# Altium PCB Receiver.PcbDoc (part 3 of 4)
Units mil, origin at the board's own origin, x right, y up, seen from the top; angles counter-clockwise.
Board outline 6370 x 5700 mil, 4 copper layers (Top Layer, GND, VCC, Bottom Layer), stack 23.756 mil thick; 303 components, 262 nets, 1184 pads, 312 vias.
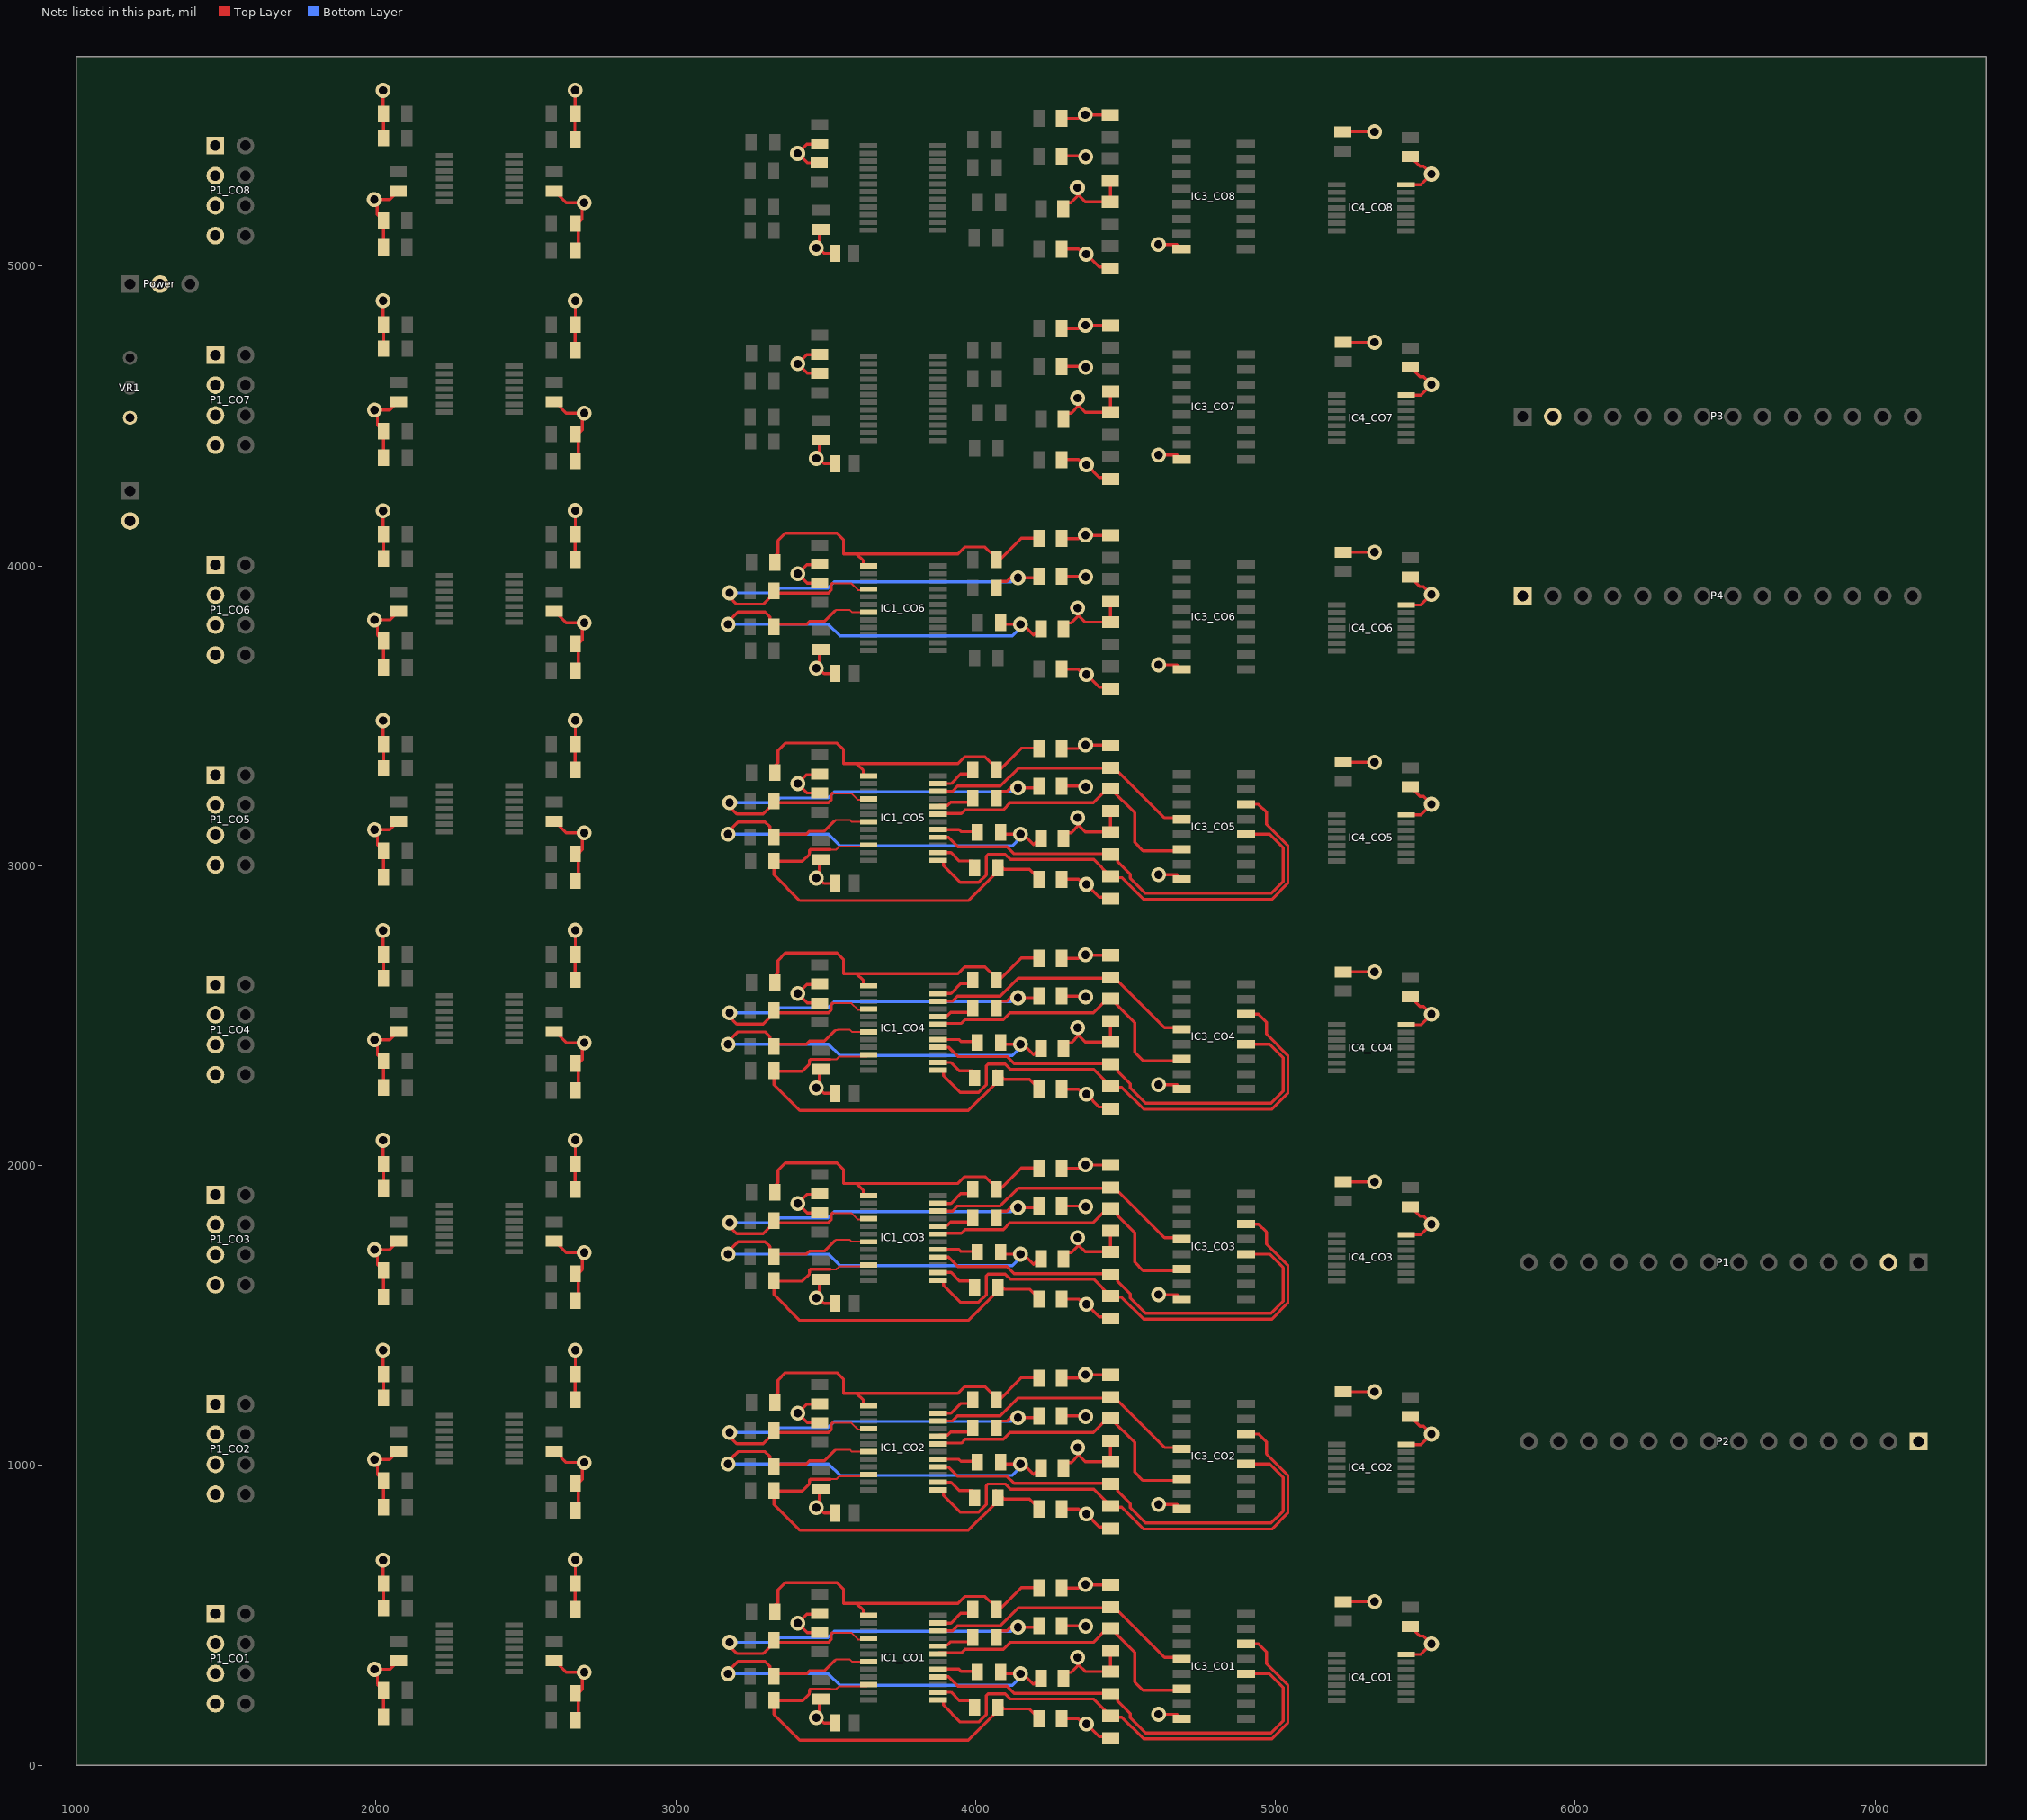
[diagram p5: the nets of this part, all layers, seen from the top]

## Via types
v1: diameter 50, hole 28, Top Layer to Bottom Layer, 312 vias

## Nets (pads, with @x,y where several pads share a name; then routed paths per layer and width w, separated by ;. In a path a pad name is that pad's centre, name@x,y a point inside that pad or via, vN(x,y) a via of type N, cw(c..) or ccw(c..) an arc to the next point about the centre after c; other vN are vias at no path point) (continued)
GND: C1_CO1.1 C1_CO2.1 C1_CO3.1 C1_CO4.1 C1_CO5.1 C1_CO6.1 C1_CO7.1 C1_CO8.1 C2_CO1.1 C2_CO2.1 C2_CO3.1 C2_CO4.1 C2_CO5.1 C2_CO6.1 C2_CO7.1 C2_CO8.1 C3_CO1.1 C3_CO2.1 C3_CO3.1 C3_CO4.1 C3_CO5.1 C3_CO6.1 C3_CO7.1 C3_CO8.1 C4_CO1.1 C4_CO2.1 C4_CO3.1 C4_CO4.1 C4_CO5.1 C4_CO6.1 C4_CO7.1 C4_CO8.1 C5_CO1.2 C5_CO2.2 C5_CO3.2 C5_CO4.2 C5_CO5.2 C5_CO6.2 C5_CO7.2 C5_CO8.2 C6_CO1.2 C6_CO2.2 C6_CO3.2 C6_CO4.2 C6_CO5.2 C6_CO6.2 C6_CO7.2 C6_CO8.2 C7_CO1.2 C7_CO2.2 C7_CO3.2 C7_CO4.2 C7_CO5.2 C7_CO6.2 C7_CO7.2 C7_CO8.2 C8_CO1.2 C8_CO2.2 C8_CO3.2 C8_CO4.2 C8_CO5.2 C8_CO6.2 C8_CO7.2 C8_CO8.2 IC3_CO1.8 IC3_CO2.8 IC3_CO3.8 IC3_CO4.8 IC3_CO5.8 IC3_CO6.8 IC3_CO7.8 IC3_CO8.8 IC4_CO1.7 IC4_CO2.7 IC4_CO3.7 IC4_CO4.7 IC4_CO5.7 IC4_CO6.7 IC4_CO7.7 IC4_CO8.7 P1.2 P1_CO1.1 P1_CO1.3 P1_CO1.5 P1_CO1.7 P1_CO2.1 P1_CO2.3 P1_CO2.5 P1_CO2.7 P1_CO3.1 P1_CO3.3 P1_CO3.5 P1_CO3.7 P1_CO4.1 P1_CO4.3 P1_CO4.5 P1_CO4.7 P1_CO5.1 P1_CO5.3 P1_CO5.5 P1_CO5.7 P1_CO6.1 P1_CO6.3 P1_CO6.5 P1_CO6.7 P1_CO7.1 P1_CO7.3 P1_CO7.5 P1_CO7.7 P1_CO8.1 P1_CO8.3 P1_CO8.5 P1_CO8.7 P2.1 P3.2 P4.1 P_T.2 Power.2 R9_CO1.2 R9_CO2.2 R9_CO3.2 R9_CO4.2 R9_CO5.2 R9_CO6.2 R9_CO7.2 R9_CO8.2 R10_CO1.2 R10_CO2.2 R10_CO3.2 R10_CO4.2 R10_CO5.2 R10_CO6.2 R10_CO7.2 R10_CO8.2 R11_CO1.1 R11_CO2.1 R11_CO3.1 R11_CO4.1 R11_CO5.1 R11_CO6.1 R11_CO7.1 R11_CO8.1 R12_CO1.1 R12_CO2.1 R12_CO3.1 R12_CO4.1 R12_CO5.1 R12_CO6.1 R12_CO7.1 R12_CO8.1 R13_CO1.1 R13_CO2.1 R13_CO3.1 R13_CO4.1 R13_CO5.1 R13_CO6.1 R13_CO7.1 R13_CO8.1 R14_CO1.2 R14_CO2.2 R14_CO3.2 R14_CO4.2 R14_CO5.2 R14_CO6.2 R14_CO7.2 R14_CO8.2 R15_CO1.2 R15_CO2.2 R15_CO3.2 R15_CO4.2 R15_CO5.2 R15_CO6.2 R15_CO7.2 R15_CO8.2 R16_CO1.1 R16_CO2.1 R16_CO3.1 R16_CO4.1 R16_CO5.1 R16_CO6.1 R16_CO7.1 R16_CO8.1 R17_CO1.2 R17_CO2.2 R17_CO3.2 R17_CO4.2 R17_CO5.2 R17_CO6.2 R17_CO7.2 R17_CO8.2 R18_CO1.1 R18_CO2.1 R18_CO3.1 R18_CO4.1 R18_CO5.1 R18_CO6.1 R18_CO7.1 R18_CO8.1 R19_CO1.2 R19_CO2.2 R19_CO3.2 R19_CO4.2 R19_CO5.2 R19_CO6.2 R19_CO7.2 R19_CO8.2 R20_CO1.2 R20_CO2.2 R20_CO3.2 R20_CO4.2 R20_CO5.2 R20_CO6.2 R20_CO7.2 R20_CO8.2 R21_CO1.2 R21_CO2.2 R21_CO3.2 R21_CO4.2 R21_CO5.2 R21_CO6.2 R21_CO7.2 R21_CO8.2 R22_CO1.2 R22_CO2.2 R22_CO3.2 R22_CO4.2 R22_CO5.2 R22_CO6.2 R22_CO7.2 R22_CO8.2 R23_CO1.1 R23_CO2.1 R23_CO3.1 R23_CO4.1 R23_CO5.1 R23_CO6.1 R23_CO7.1 R23_CO8.1 R24_CO1.1 R24_CO2.1 R24_CO3.1 R24_CO4.1 R24_CO5.1 R24_CO6.1 R24_CO7.1 R24_CO8.1 VR1.1 | length 18635.3
  Top Layer w10: v1(2023.94,5586.18) 2023.94,5508.23 R17_CO8.2@2025.2,5506.97 ; v1(2024.37,684.21) 2024.37,606.26 R17_CO1.2@2025.63,605 ; v1(2024.37,1384.21) 2024.37,1306.26 R17_CO2.2@2025.63,1305 ; v1(2024.37,2084.21) 2024.37,2006.26 R17_CO3.2@2025.63,2005 ; v1(2024.37,2784.21) 2024.37,2706.26 R17_CO4.2@2025.63,2705 ; v1(2024.37,3484.21) 2024.37,3406.26 R17_CO5.2@2025.63,3405 ; v1(2024.37,4184.21) 2024.37,4106.26 R17_CO6.2@2025.63,4105 ; v1(2024.37,4884.21) 2024.37,4806.26 R17_CO7.2@2025.63,4805 ; R18_CO8.1@2025.2,5062.97 R14_CO8.2@2025.2,5151.97 2004.57,5172.6 2004.57,5201.15 1994.57,5211.15 v1(1994.57,5221.97) 2046.57,5221.97 C5_CO8.2@2074.57,5249.97 ; R18_CO1.1@2025.63,161 R14_CO1.2@2025.63,250 2005,270.63 2005,299.18 1995,309.18 v1(1995,320) 2047,320 C5_CO1.2@2075,348 ; R18_CO2.1@2025.63,861 R14_CO2.2@2025.63,950 2005,970.63 2005,999.18 1995,1009.18 v1(1995,1020) 2047,1020 C5_CO2.2@2075,1048 ; R18_CO3.1@2025.63,1561 R14_CO3.2@2025.63,1650 2005,1670.63 2005,1699.18 1995,1709.18 v1(1995,1720) 2047,1720 C5_CO3.2@2075,1748 ; R18_CO4.1@2025.63,2261 R14_CO4.2@2025.63,2350 2005,2370.63 2005,2399.18 1995,2409.18 v1(1995,2420) 2047,2420 C5_CO4.2@2075,2448 ; R18_CO5.1@2025.63,2961 R14_CO5.2@2025.63,3050 2005,3070.63 2005,3099.18 1995,3109.18 v1(1995,3120) 2047,3120 C5_CO5.2@2075,3148 ; R18_CO6.1@2025.63,3661 R14_CO6.2@2025.63,3750 2005,3770.63 2005,3799.18 1995,3809.18 v1(1995,3820) 2047,3820 C5_CO6.2@2075,3848 ; R18_CO7.1@2025.63,4361 R14_CO7.2@2025.63,4450 2005,4470.63 2005,4499.18 1995,4509.18 v1(1995,4520) 2047,4520 C5_CO7.2@2075,4548 ; R13_CO8.1@2025.83,5406.08 R17_CO8.2@2025.83,5492.76 ; R13_CO1.1@2026.26,504.11 R17_CO1.2@2026.26,590.79 ; R13_CO2.1@2026.26,1204.11 R17_CO2.2@2026.26,1290.79 ; R13_CO3.1@2026.26,1904.11 R17_CO3.2@2026.26,1990.79 ; R13_CO4.1@2026.26,2604.11 R17_CO4.2@2026.26,2690.79 ; R13_CO5.1@2026.26,3304.11 R17_CO5.2@2026.26,3390.79 ; R13_CO6.1@2026.26,4004.11 R17_CO6.2@2026.26,4090.79 ; R13_CO7.1@2026.26,4704.11 R17_CO7.2@2026.26,4790.79 ; C6_CO8.2@2594.57,5249.97 2598.26,5246.28 2598.98,5246.99 2634,5211.97 v1(2694.57,5211.97) 2687.64,5205.04 2687.64,5155.67 2673.94,5141.97 2674.57,5141.34 R19_CO8.2@2674.57,5051.97 ; C6_CO1.2@2595,348 2598.69,344.31 2599.41,345.02 2634.43,310 v1(2695,310) 2688.07,303.07 2688.07,253.7 2674.37,240 2675,239.37 R19_CO1.2@2675,150 ; C6_CO2.2@2595,1048 2598.69,1044.31 2599.41,1045.02 2634.43,1010 v1(2695,1010) 2688.07,1003.07 2688.07,953.7 2674.37,940 2675,939.37 R19_CO2.2@2675,850 ; C6_CO3.2@2595,1748 2598.69,1744.31 2599.41,1745.02 2634.43,1710 v1(2695,1710) 2688.07,1703.07 2688.07,1653.7 2674.37,1640 2675,1639.37 R19_CO3.2@2675,1550 ; C6_CO4.2@2595,2448 2598.69,2444.31 2599.41,2445.02 2634.43,2410 v1(2695,2410) 2688.07,2403.07 2688.07,2353.7 2674.37,2340 2675,2339.37 R19_CO4.2@2675,2250 ; C6_CO5.2@2595,3148 2598.69,3144.31 2599.41,3145.02 2634.43,3110 v1(2695,3110) 2688.07,3103.07 2688.07,3053.7 2674.37,3040 2675,3039.37 R19_CO5.2@2675,2950 ; C6_CO6.2@2595,3848 2598.69,3844.31 2599.41,3845.02 2634.43,3810 v1(2695,3810) 2688.07,3803.07 2688.07,3753.7 2674.37,3740 2675,3739.37 R19_CO6.2@2675,3650 ; C6_CO7.2@2595,4548 2598.69,4544.31 2599.41,4545.02 2634.43,4510 v1(2695,4510) 2688.07,4503.07 2688.07,4453.7 2674.37,4440 2675,4439.37 R19_CO7.2@2675,4350 ; R16_CO8.1@2663.94,5406.08 R16_CO8.1@2663.94,5421.97 R20_CO8.2@2663.94,5492.76 ; R20_CO8.2@2663.94,5506.97 2664.57,5507.6 2659.57,5512.6 2664.57,5517.6 v1(2664.57,5586.97) ; R16_CO1.1@2664.37,504.11 R16_CO1.1@2664.37,520 R20_CO1.2@2664.37,590.79 ; R20_CO1.2@2664.37,605 2665,605.63 2660,610.63 2665,615.63 v1(2665,685) ; R16_CO2.1@2664.37,1204.11 R16_CO2.1@2664.37,1220 R20_CO2.2@2664.37,1290.79 ; R20_CO2.2@2664.37,1305 2665,1305.63 2660,1310.63 2665,1315.63 v1(2665,1385) ; R16_CO3.1@2664.37,1904.11 R16_CO3.1@2664.37,1920 R20_CO3.2@2664.37,1990.79 ; R20_CO3.2@2664.37,2005 2665,2005.63 2660,2010.63 2665,2015.63 v1(2665,2085) ; R16_CO4.1@2664.37,2604.11 R16_CO4.1@2664.37,2620 R20_CO4.2@2664.37,2690.79 ; R20_CO4.2@2664.37,2705 2665,2705.63 2660,2710.63 2665,2715.63 v1(2665,2785) ; R16_CO5.1@2664.37,3304.11 R16_CO5.1@2664.37,3320 R20_CO5.2@2664.37,3390.79 ; R20_CO5.2@2664.37,3405 2665,3405.63 2660,3410.63 2665,3415.63 v1(2665,3485) ; R16_CO6.1@2664.37,4004.11 R16_CO6.1@2664.37,4020 R20_CO6.2@2664.37,4090.79 ; R20_CO6.2@2664.37,4105 2665,4105.63 2660,4110.63 2665,4115.63 v1(2665,4185) ; R16_CO7.1@2664.37,4704.11 R16_CO7.1@2664.37,4720 R20_CO7.2@2664.37,4790.79 ; R20_CO7.2@2664.37,4805 2665,4805.63 2660,4810.63 2665,4815.63 v1(2665,4885) ; C2_CO8.1@3474.19,5410.09 3470.35,5406.25 3436.55,5406.25 v1(3406.38,5376.08) 3437.92,5344.54 C1_CO8.1@3478.77,5344.54 ; C2_CO1.1@3474.62,508.12 3470.79,504.28 3436.98,504.28 v1(3406.81,474.11) 3438.35,442.57 C1_CO1.1@3479.2,442.57 ; C2_CO2.1@3474.62,1208.12 3470.79,1204.28 3436.98,1204.28 v1(3406.81,1174.11) 3438.35,1142.57 C1_CO2.1@3479.2,1142.57 ; C2_CO3.1@3474.62,1908.12 3470.79,1904.28 3436.98,1904.28 v1(3406.81,1874.11) 3438.35,1842.57 C1_CO3.1@3479.2,1842.57 ; C2_CO4.1@3474.62,2608.12 3470.79,2604.28 3436.98,2604.28 v1(3406.81,2574.11) 3438.35,2542.57 C1_CO4.1@3479.2,2542.57 ; C2_CO5.1@3474.62,3308.12 3470.79,3304.28 3436.98,3304.28 v1(3406.81,3274.11) 3438.35,3242.57 C1_CO5.1@3479.2,3242.57 ; C2_CO6.1@3474.62,4008.12 3470.79,4004.28 3436.98,4004.28 v1(3406.81,3974.11) 3438.35,3942.57 C1_CO6.1@3479.2,3942.57 ; C2_CO7.1@3474.62,4708.12 3470.79,4704.28 3436.98,4704.28 v1(3406.81,4674.11) 3438.35,4642.57 C1_CO7.1@3479.2,4642.57 ; C4_CO8.1@3478.77,5124.2 3478.77,5082.18 3468.38,5071.79 v1(3468.38,5060.96) 3476.24,5060.96 3494.24,5042.96 C3_CO8.1@3530.44,5042.96 ; C4_CO1.1@3479.2,222.23 3479.2,180.21 3468.81,169.82 v1(3468.81,158.99) 3476.67,158.99 3494.67,140.99 C3_CO1.1@3530.87,140.99 ; C4_CO2.1@3479.2,922.23 3479.2,880.21 3468.81,869.82 v1(3468.81,858.99) 3476.67,858.99 3494.67,840.99 C3_CO2.1@3530.87,840.99 ; C4_CO3.1@3479.2,1622.23 3479.2,1580.21 3468.81,1569.82 v1(3468.81,1558.99) 3476.67,1558.99 3494.67,1540.99 C3_CO3.1@3530.87,1540.99 ; C4_CO4.1@3479.2,2322.23 3479.2,2280.21 3468.81,2269.82 v1(3468.81,2258.99) 3476.67,2258.99 3494.67,2240.99 C3_CO4.1@3530.87,2240.99 ; C4_CO5.1@3479.2,3022.23 3479.2,2980.21 3468.81,2969.82 v1(3468.81,2958.99) 3476.67,2958.99 3494.67,2940.99 C3_CO5.1@3530.87,2940.99 ; C4_CO6.1@3479.2,3722.23 3479.2,3680.21 3468.81,3669.82 v1(3468.81,3658.99) 3476.67,3658.99 3494.67,3640.99 C3_CO6.1@3530.87,3640.99 ; C4_CO7.1@3479.2,4422.23 3479.2,4380.21 3468.81,4369.82 v1(3468.81,4358.99) 3476.67,4358.99 3494.67,4340.99 C3_CO7.1@3530.87,4340.99 ; R10_CO8.2@4285.65,5374.48 R10_CO8.2@4292.82,5381.66 ; R10_CO1.2@4286.08,472.51 R10_CO1.2@4293.25,479.69 ; R10_CO2.2@4286.08,1172.51 R10_CO2.2@4293.25,1179.69 ; R10_CO3.2@4286.08,1872.51 R10_CO3.2@4293.25,1879.69 ; R10_CO4.2@4286.08,2572.51 R10_CO4.2@4293.25,2579.69 ; R10_CO5.2@4286.08,3272.51 R10_CO5.2@4293.25,3279.69 ; R10_CO6.2@4286.08,3972.51 R10_CO6.2@4293.25,3979.69 ; R10_CO7.2@4286.08,4672.51 R10_CO7.2@4293.25,4679.69 ; R11_CO8.1@4286.97,5056.97 4343.25,5056.97 4360.22,5040 v1(4369.11,5040) 4411.88,4997.23 4444.31,4997.23 R23_CO8.1@4449.57,4991.97 ; R12_CO8.1@4286.97,5191.97 4286.97,5197.03 4301.65,5211.72 4318.12,5211.72 4343.2,5236.8 ; R10_CO8.2@4286.97,5367.45 4364.75,5367.45 v1(4367.2,5365) ; R9_CO8.2@4286.97,5493.23 4343.49,5493.23 4355.26,5505 v1(4366.08,5505) 4367.2,5503.88 R21_CO8.2@4449.57,5503.88 ; R11_CO1.1@4287.4,155 4343.69,155 4360.66,138.03 v1(4369.54,138.03) 4412.31,95.26 4444.74,95.26 R23_CO1.1@4450,90 ; R12_CO1.1@4287.4,290 4287.4,295.06 4302.09,309.75 4318.55,309.75 4343.63,334.83 ; R10_CO1.2@4287.4,465.48 4365.18,465.48 v1(4367.63,463.03) ; R9_CO1.2@4287.4,591.26 4343.92,591.26 4355.69,603.03 v1(4366.51,603.03) 4367.63,601.91 R21_CO1.2@4450,601.91 ; R11_CO2.1@4287.4,855 4343.69,855 4360.66,838.03 v1(4369.54,838.03) 4412.31,795.26 4444.74,795.26 R23_CO2.1@4450,790 ; R12_CO2.1@4287.4,990 4287.4,995.06 4302.09,1009.75 4318.55,1009.75 4343.63,1034.83 ; R10_CO2.2@4287.4,1165.48 4365.18,1165.48 v1(4367.63,1163.03) ; R9_CO2.2@4287.4,1291.26 4343.92,1291.26 4355.69,1303.03 v1(4366.51,1303.03) 4367.63,1301.91 R21_CO2.2@4450,1301.91 ; R11_CO3.1@4287.4,1555 4343.69,1555 4360.66,1538.03 v1(4369.54,1538.03) 4412.31,1495.26 4444.74,1495.26 R23_CO3.1@4450,1490 ; R12_CO3.1@4287.4,1690 4287.4,1695.06 4302.09,1709.75 4318.55,1709.75 4343.63,1734.83 ; R10_CO3.2@4287.4,1865.48 4365.18,1865.48 v1(4367.63,1863.03) ; R9_CO3.2@4287.4,1991.26 4343.92,1991.26 4355.69,2003.03 v1(4366.51,2003.03) 4367.63,2001.91 R21_CO3.2@4450,2001.91 ; R11_CO4.1@4287.4,2255 4343.69,2255 4360.66,2238.03 v1(4369.54,2238.03) 4412.31,2195.26 4444.74,2195.26 R23_CO4.1@4450,2190 ; R12_CO4.1@4287.4,2390 4287.4,2395.06 4302.09,2409.75 4318.55,2409.75 4343.63,2434.83 ; R10_CO4.2@4287.4,2565.48 4365.18,2565.48 v1(4367.63,2563.03) ; R9_CO4.2@4287.4,2691.26 4343.92,2691.26 4355.69,2703.03 v1(4366.51,2703.03) 4367.63,2701.91 R21_CO4.2@4450,2701.91 ; R11_CO5.1@4287.4,2955 4343.69,2955 4360.66,2938.03 v1(4369.54,2938.03) 4412.31,2895.26 4444.74,2895.26 R23_CO5.1@4450,2890 ; R12_CO5.1@4287.4,3090 4287.4,3095.06 4302.09,3109.75 4318.55,3109.75 4343.63,3134.83 ; R10_CO5.2@4287.4,3265.48 4365.18,3265.48 v1(4367.63,3263.03) ; R9_CO5.2@4287.4,3391.26 4343.92,3391.26 4355.69,3403.03 v1(4366.51,3403.03) 4367.63,3401.91 R21_CO5.2@4450,3401.91 ; R11_CO6.1@4287.4,3655 4343.69,3655 4360.66,3638.03 v1(4369.54,3638.03) 4412.31,3595.26 4444.74,3595.26 R23_CO6.1@4450,3590 ; R12_CO6.1@4287.4,3790 4287.4,3795.06 4302.09,3809.75 4318.55,3809.75 4343.63,3834.83 ; R10_CO6.2@4287.4,3965.48 4365.18,3965.48 v1(4367.63,3963.03) ; R9_CO6.2@4287.4,4091.26 4343.92,4091.26 4355.69,4103.03 v1(4366.51,4103.03) 4367.63,4101.91 R21_CO6.2@4450,4101.91 ; R11_CO7.1@4287.4,4355 4343.69,4355 4360.66,4338.03 v1(4369.54,4338.03) 4412.31,4295.26 4444.74,4295.26 R23_CO7.1@4450,4290 ; R12_CO7.1@4287.4,4490 4287.4,4495.06 4302.09,4509.75 4318.55,4509.75 4343.63,4534.83 ; R10_CO7.2@4287.4,4665.48 4365.18,4665.48 v1(4367.63,4663.03) ; R9_CO7.2@4287.4,4791.26 4343.92,4791.26 4355.69,4803.03 v1(4366.51,4803.03) 4367.63,4801.91 R21_CO7.2@4450,4801.91 ; v1(4339.57,5261.97) 4318.03,5261.97 4328.8,5251.2 4343.2,5236.8 ; v1(4340,360) 4318.46,360 4329.23,349.23 4343.63,334.83 ; v1(4340,1060) 4318.46,1060 4329.23,1049.23 4343.63,1034.83 ; v1(4340,1760) 4318.46,1760 4329.23,1749.23 4343.63,1734.83 ; v1(4340,2460) 4318.46,2460 4329.23,2449.23 4343.63,2434.83 ; v1(4340,3160) 4318.46,3160 4329.23,3149.23 4343.63,3134.83 ; v1(4340,3860) 4318.46,3860 4329.23,3849.23 4343.63,3834.83 ; v1(4340,4560) 4318.46,4560 4329.23,4549.23 4343.63,4534.83 ; R22_CO8.2@4449.57,5284.32 R24_CO8.1@4449.57,5214.62 4365.38,5214.62 4343.2,5236.8 ; R22_CO1.2@4450,382.35 R24_CO1.1@4450,312.65 4365.82,312.65 4343.63,334.83 ; R22_CO2.2@4450,1082.35 R24_CO2.1@4450,1012.65 4365.82,1012.65 4343.63,1034.83 ; R22_CO3.2@4450,1782.35 R24_CO3.1@4450,1712.65 4365.82,1712.65 4343.63,1734.83 ; R22_CO4.2@4450,2482.35 R24_CO4.1@4450,2412.65 4365.82,2412.65 4343.63,2434.83 ; R22_CO5.2@4450,3182.35 R24_CO5.1@4450,3112.65 4365.82,3112.65 4343.63,3134.83 ; R22_CO6.2@4450,3882.35 R24_CO6.1@4450,3812.65 4365.82,3812.65 4343.63,3834.83 ; R22_CO7.2@4450,4582.35 R24_CO7.1@4450,4512.65 4365.82,4512.65 4343.63,4534.83 ; v1(4609.57,5071.97) 4672.16,5071.97 IC3_CO8.8@4675.84,5068.28 ; v1(4610,170) 4672.59,170 IC3_CO1.8@4676.28,166.31 ; v1(4610,870) 4672.59,870 IC3_CO2.8@4676.28,866.31 ; v1(4610,1570) 4672.59,1570 IC3_CO3.8@4676.28,1566.31 ; v1(4610,2270) 4672.59,2270 IC3_CO4.8@4676.28,2266.31 ; v1(4610,2970) 4672.59,2970 IC3_CO5.8@4676.28,2966.31 ; v1(4610,3670) 4672.59,3670 IC3_CO6.8@4676.28,3666.31 ; v1(4610,4370) 4672.59,4370 IC3_CO7.8@4676.28,4366.31 ; C8_CO8.2@5225,5447.75 v1(5330,5447.75) v1@5332.75,5445 ; C8_CO1.2@5225.43,545.78 v1(5330.43,545.78) v1@5333.18,543.03 ; C8_CO2.2@5225.43,1245.78 v1(5330.43,1245.78) v1@5333.18,1243.03 ; C8_CO3.2@5225.43,1945.78 v1(5330.43,1945.78) v1@5333.18,1943.03 ; C8_CO4.2@5225.43,2645.78 v1(5330.43,2645.78) v1@5333.18,2643.03 ; C8_CO5.2@5225.43,3345.78 v1(5330.43,3345.78) v1@5333.18,3343.03 ; C8_CO6.2@5225.43,4045.78 v1(5330.43,4045.78) v1@5333.18,4043.03 ; C8_CO7.2@5225.43,4745.78 v1(5330.43,4745.78) v1@5333.18,4743.03 ; IC4_CO8.7@5435.67,5271.77 5484.8,5271.77 v1(5520,5306.97) 5493.97,5333 5481.57,5333 C7_CO8.2@5449.57,5365 ; IC4_CO1.7@5436.1,369.8 5485.23,369.8 v1(5520.43,405) 5494.4,431.03 5482,431.03 C7_CO1.2@5450,463.03 ; IC4_CO2.7@5436.1,1069.8 5485.23,1069.8 v1(5520.43,1105) 5494.4,1131.03 5482,1131.03 C7_CO2.2@5450,1163.03 ; IC4_CO3.7@5436.1,1769.8 5485.23,1769.8 v1(5520.43,1805) 5494.4,1831.03 5482,1831.03 C7_CO3.2@5450,1863.03 ; IC4_CO4.7@5436.1,2469.8 5485.23,2469.8 v1(5520.43,2505) 5494.4,2531.03 5482,2531.03 C7_CO4.2@5450,2563.03 ; IC4_CO5.7@5436.1,3169.8 5485.23,3169.8 v1(5520.43,3205) 5494.4,3231.03 5482,3231.03 C7_CO5.2@5450,3263.03 ; IC4_CO6.7@5436.1,3869.8 5485.23,3869.8 v1(5520.43,3905) 5494.4,3931.03 5482,3931.03 C7_CO6.2@5450,3963.03 ; IC4_CO7.7@5436.1,4569.8 5485.23,4569.8 v1(5520.43,4605) 5494.4,4631.03 5482,4631.03 C7_CO7.2@5450,4663.03
NetIC1_CO1_1: IC1_CO1.1 R1_CO1.2 R2_CO1.2 R9_CO1.1 | length 1146.5
  Top Layer w10: R1_CO1.2@3327.94,506.75 3331.13,509.94 3331.13,533.31 3341.07,543.25 3341.07,584.44 3365.62,608.99 3537.19,608.99 3559.43,586.75 3559.43,540.41 3602.83,540.41 ; IC1_CO1.1@3643.54,499.7 3629.39,499.7 3625.53,503.56 3625.53,517.7 3602.83,540.41 ; R2_CO1.2@4062.49,532.22 4031.69,563.03 3964.25,563.03 3941.63,540.41 3602.83,540.41 ; R2_CO1.2@4067.34,506.75 4153.11,592.52 4209.37,592.52 4210.63,591.26 R9_CO1.1@4210.63,582.4
NetIC1_CO1_4: IC1_CO1.4 R3_CO1.2 R4_CO1.2 R10_CO1.1 | length 1735.8
  Top Layer w6: 3522.97,441.75 3585.97,441.75 3607.97,419.75 3640.35,419.75 IC1_CO1.4@3643.54,422.93
  Top Layer w10: v1(3180,410) 3180,400.6 3177.97,398.57 3203.83,372.71 3292.11,372.71 3297.97,378.57 ; 3298.04,378.59 3327.34,407.89 R3_CO1.2@3327.34,416.75 ; R3_CO1.2@3327.94,406.75 3331.13,409.94 3509.26,409.94 3518.7,419.38 3518.7,437.48 3522.97,441.75 ; R4_CO1.2@4056.98,425.61 R4_CO1.2@4069.37,425.61 4069.37,434.46 4083.07,448.17 4104.16,448.17 4133.63,477.64 4141.27,470 v1(4141.27,460) 4207.12,460 R10_CO1.1@4212.6,465.48 ; R10_CO1.1@4207.34,472.51 R10_CO1.1@4207.34,481.37
  Bottom Layer w10: v1(3180,410) 3331.22,410 3347.22,426 3507.22,426 3527.97,446.75 4117.97,446.75 4135,463.78 v1@4140,463.78
NetIC1_CO1_7: IC1_CO1.7 R5_CO1.2 R6_CO1.2 R12_CO1.2 | length 1664
  Top Layer w6: 3530.76,349.71 3533.76,352.71 3540.56,352.71 3540.6,352.75 3580.76,352.75 3587.35,346.16 IC1_CO1.7@3643.54,346.16
  Top Layer w10: 3187.97,326.75 3207.38,346.16 3297.97,346.16 3313.64,330.49 3313.64,310.45 R5_CO1.2@3327.34,296.75 ; R5_CO1.2@3333.73,316.75 3333.73,312.31 3341.04,305 3435.92,305 3446.15,315.23 3496.28,315.23 3530.76,349.71 ; R6_CO1.2@4084.37,310.96 4090.33,305 v1@4128.51,305 ; v1(4150,305) 4158.5,305 4193.05,270.45 R12_CO1.2@4212.6,290
  Bottom Layer w10: v1(3175,305) 3509.72,305 3547.97,266.75 4122.57,266.75 4150,294.18 v1(4150,305)
NetIC1_CO1_10: IC1_CO1.10 R7_CO1.2 R8_CO1.2 R11_CO1.2 | length 1397.6
  Top Layer w6: 3515.2,254.23 3535.46,254.23 3544.95,263.71 3637.86,263.71 IC1_CO1.10@3643.54,269.39
  Top Layer w10: R7_CO1.2@3326.94,215 R7_CO1.2@3327.94,216 R7_CO1.2@3327.94,215 ; 3515.2,254.23 3449.15,254.23 3446.81,251.89 3446.81,251.23 3446.15,251.23 3446.15,244.2 3445.5,243.56 3445.5,238.34 3422.16,215 R7_CO1.2@3327.94,215 ; R8_CO1.2@4067.34,216 4095.31,188.03 4179.57,188.03 R11_CO1.2@4212.6,155 ; R8_CO1.2@4074.8,193.03 4068.73,186.96 4068.73,176.33 3976.4,83.99 3413.83,83.99 3327.94,169.87 R7_CO1.2@3327.94,215
NetIC1_CO1_13: IC1_CO1.13 IC3_CO1.14 R23_CO1.2 | length 1711.3
  Top Layer w10: IC1_CO1.13@3874.87,218.21 3889.02,218.21 3892.87,214.35 3892.87,200.2 3948.59,144.49 4010.43,144.49 4035.43,169.49 4035.43,232.49 4041.29,238.34 4098.84,238.34 4116.19,221 4393.8,221 R23_CO1.2@4450,164.8 4454.03,160.78 4487.69,160.78 4560.43,88.03 4988.06,88.03 5041.43,141.4 5041.43,267.66 4970.43,338.66 4970.43,378.57 4944,405 IC3_CO1.14@4902.16,405
NetIC1_CO1_14: IC1_CO1.14 R8_CO1.1 | length 125.2
  Top Layer w10: IC1_CO1.14@3874.87,243.8 3917.97,243.8 3945.76,216 R8_CO1.1@3988.6,216
NetIC1_CO1_16: IC1_CO1.16 IC3_CO1.12 R24_CO1.2 | length 1511.5
  Top Layer w10: IC1_CO1.16@3874.87,294.98 3910.36,294.98 3941.63,263.71 4104.8,263.71 4128.51,240 4447.84,240 R24_CO1.2@4450,237.84 4458.86,237.84 4473.54,223.16 4473.54,214.3 4515.43,172.41 4515.43,158.99 4566.4,108.03 4985.43,108.03 5025.43,148.03 5025.43,260 4980.43,305 IC3_CO1.12@4902.16,305
NetIC1_CO1_17: IC1_CO1.17 R6_CO1.1 | length 116.6
  Top Layer w10: IC1_CO1.17@3874.87,320.57 3944.28,320.57 3951.13,313.71 R6_CO1.1@3988.6,313.71
NetIC1_CO1_19: IC1_CO1.19 IC3_CO1.6 R22_CO1.1 | length 983.6
  Top Layer w10: IC1_CO1.19@3874.87,371.75 3877.84,374.71 3952.6,374.71 3964.93,387.05 4092.63,387.05 4115.58,410 4393.22,410 R22_CO1.1@4440,456.78 ; R22_CO1.1@4450,457.15 4530.43,376.72 4530.43,278.03 4558.46,250 4682.59,250 IC3_CO1.6@4687.59,255
NetIC1_CO1_20: IC1_CO1.20 R4_CO1.1 | length 119.7
  Top Layer w10: IC1_CO1.20@3874.87,397.34 3878.73,401.2 3906.59,401.2 3917.14,411.75 R4_CO1.1@3988.6,411.75
NetIC1_CO1_22: IC1_CO1.22 IC3_CO1.4 R21_CO1.1 | length 914.8
  Top Layer w10: IC1_CO1.22@3874.87,448.52 3923.04,448.52 3940,465.48 4082.8,465.48 4142.31,525 4440,525 4465.43,525 4630.43,360 4682.59,360 IC3_CO1.4@4687.59,355
NetIC1_CO1_23: IC1_CO1.23 R2_CO1.1 | length 127.2
  Top Layer w10: IC1_CO1.23@3874.87,474.11 3917.97,474.11 3950.61,506.75 R2_CO1.1@3988.6,506.75
NetIC1_CO2_1: IC1_CO2.1 R1_CO2.2 R2_CO2.2 R9_CO2.1 | length 1146.5
  Top Layer w10: R1_CO2.2@3327.94,1206.75 3331.13,1209.94 3331.13,1233.31 3341.07,1243.25 3341.07,1284.44 3365.62,1308.99 3537.19,1308.99 3559.43,1286.75 3559.43,1240.41 3602.83,1240.41 ; IC1_CO2.1@3643.54,1199.7 3629.39,1199.7 3625.53,1203.56 3625.53,1217.7 3602.83,1240.41 ; R2_CO2.2@4062.49,1232.22 4031.69,1263.03 3964.25,1263.03 3941.63,1240.41 3602.83,1240.41 ; R2_CO2.2@4067.34,1206.75 4153.11,1292.52 4209.37,1292.52 4210.63,1291.26 R9_CO2.1@4210.63,1282.4
NetIC1_CO2_4: IC1_CO2.4 R3_CO2.2 R4_CO2.2 R10_CO2.1 | length 1735.8
  Top Layer w6: 3522.97,1141.75 3585.97,1141.75 3607.97,1119.75 3640.35,1119.75 IC1_CO2.4@3643.54,1122.93
  Top Layer w10: v1(3180,1110) 3180,1100.6 3177.97,1098.57 3203.83,1072.71 3292.11,1072.71 3297.97,1078.57 ; 3298.04,1078.59 3327.34,1107.89 R3_CO2.2@3327.34,1116.75 ; R3_CO2.2@3327.94,1106.75 3331.13,1109.94 3509.26,1109.94 3518.7,1119.38 3518.7,1137.48 3522.97,1141.75 ; R4_CO2.2@4056.98,1125.61 R4_CO2.2@4069.37,1125.61 4069.37,1134.46 4083.07,1148.17 4104.16,1148.17 4133.63,1177.64 4141.27,1170 v1(4141.27,1160) 4207.12,1160 R10_CO2.1@4212.6,1165.48 ; R10_CO2.1@4207.34,1172.51 R10_CO2.1@4207.34,1181.37
  Bottom Layer w10: v1(3180,1110) 3331.22,1110 3347.22,1126 3507.22,1126 3527.97,1146.75 4117.97,1146.75 4135,1163.78 v1@4140,1163.78
NetIC1_CO2_7: IC1_CO2.7 R5_CO2.2 R6_CO2.2 R12_CO2.2 | length 1664
  Top Layer w6: 3530.76,1049.71 3533.76,1052.71 3540.56,1052.71 3540.6,1052.75 3580.76,1052.75 3587.35,1046.16 IC1_CO2.7@3643.54,1046.16
  Top Layer w10: 3187.97,1026.75 3207.38,1046.16 3297.97,1046.16 3313.64,1030.49 3313.64,1010.45 R5_CO2.2@3327.34,996.75 ; R5_CO2.2@3333.73,1016.75 3333.73,1012.31 3341.04,1005 3435.92,1005 3446.15,1015.23 3496.28,1015.23 3530.76,1049.71 ; R6_CO2.2@4084.37,1010.96 4090.33,1005 v1@4128.51,1005 ; v1(4150,1005) 4158.5,1005 4193.05,970.45 R12_CO2.2@4212.6,990
  Bottom Layer w10: v1(3175,1005) 3509.72,1005 3547.97,966.75 4122.57,966.75 4150,994.18 v1(4150,1005)
NetIC1_CO2_10: IC1_CO2.10 R7_CO2.2 R8_CO2.2 R11_CO2.2 | length 1397.6
  Top Layer w6: 3515.2,954.23 3535.46,954.23 3544.95,963.71 3637.86,963.71 IC1_CO2.10@3643.54,969.39
  Top Layer w10: R7_CO2.2@3326.94,915 R7_CO2.2@3327.94,916 R7_CO2.2@3327.94,915 ; 3515.2,954.23 3449.15,954.23 3446.81,951.89 3446.81,951.23 3446.15,951.23 3446.15,944.2 3445.5,943.56 3445.5,938.34 3422.16,915 R7_CO2.2@3327.94,915 ; R8_CO2.2@4067.34,916 4095.31,888.03 4179.57,888.03 R11_CO2.2@4212.6,855 ; R8_CO2.2@4074.8,893.03 4068.73,886.96 4068.73,876.33 3976.4,783.99 3413.83,783.99 3327.94,869.87 R7_CO2.2@3327.94,915
NetIC1_CO2_13: IC1_CO2.13 IC3_CO2.14 R23_CO2.2 | length 1711.3
  Top Layer w10: IC1_CO2.13@3874.87,918.21 3889.02,918.21 3892.87,914.35 3892.87,900.2 3948.59,844.49 4010.43,844.49 4035.43,869.49 4035.43,932.49 4041.29,938.34 4098.84,938.34 4116.19,921 4393.8,921 R23_CO2.2@4450,864.8 4454.03,860.78 4487.69,860.78 4560.43,788.03 4988.06,788.03 5041.43,841.4 5041.43,967.66 4970.43,1038.66 4970.43,1078.57 4944,1105 IC3_CO2.14@4902.16,1105
NetIC1_CO2_14: IC1_CO2.14 R8_CO2.1 | length 125.2
  Top Layer w10: IC1_CO2.14@3874.87,943.8 3917.97,943.8 3945.76,916 R8_CO2.1@3988.6,916
NetIC1_CO2_16: IC1_CO2.16 IC3_CO2.12 R24_CO2.2 | length 1511.5
  Top Layer w10: IC1_CO2.16@3874.87,994.98 3910.36,994.98 3941.63,963.71 4104.8,963.71 4128.51,940 4447.84,940 R24_CO2.2@4450,937.84 4458.86,937.84 4473.54,923.16 4473.54,914.3 4515.43,872.41 4515.43,858.99 4566.4,808.03 4985.43,808.03 5025.43,848.03 5025.43,960 4980.43,1005 IC3_CO2.12@4902.16,1005
NetIC1_CO2_17: IC1_CO2.17 R6_CO2.1 | length 116.6
  Top Layer w10: IC1_CO2.17@3874.87,1020.57 3944.28,1020.57 3951.13,1013.71 R6_CO2.1@3988.6,1013.71
NetIC1_CO2_19: IC1_CO2.19 IC3_CO2.6 R22_CO2.1 | length 983.6
  Top Layer w10: IC1_CO2.19@3874.87,1071.75 3877.84,1074.71 3952.6,1074.71 3964.93,1087.05 4092.63,1087.05 4115.58,1110 4393.22,1110 R22_CO2.1@4440,1156.78 ; R22_CO2.1@4450,1157.15 4530.43,1076.72 4530.43,978.03 4558.46,950 4682.59,950 IC3_CO2.6@4687.59,955
NetIC1_CO2_20: IC1_CO2.20 R4_CO2.1 | length 119.7
  Top Layer w10: IC1_CO2.20@3874.87,1097.34 3878.73,1101.2 3906.59,1101.2 3917.14,1111.75 R4_CO2.1@3988.6,1111.75
NetIC1_CO2_22: IC1_CO2.22 IC3_CO2.4 R21_CO2.1 | length 914.8
  Top Layer w10: IC1_CO2.22@3874.87,1148.52 3923.04,1148.52 3940,1165.48 4082.8,1165.48 4142.31,1225 4440,1225 4465.43,1225 4630.43,1060 4682.59,1060 IC3_CO2.4@4687.59,1055
NetIC1_CO2_23: IC1_CO2.23 R2_CO2.1 | length 127.2
  Top Layer w10: IC1_CO2.23@3874.87,1174.11 3917.97,1174.11 3950.61,1206.75 R2_CO2.1@3988.6,1206.75
NetIC1_CO3_1: IC1_CO3.1 R1_CO3.2 R2_CO3.2 R9_CO3.1 | length 1146.5
  Top Layer w10: R1_CO3.2@3327.94,1906.75 3331.13,1909.94 3331.13,1933.31 3341.07,1943.25 3341.07,1984.44 3365.62,2008.99 3537.19,2008.99 3559.43,1986.75 3559.43,1940.41 3602.83,1940.41 ; IC1_CO3.1@3643.54,1899.7 3629.39,1899.7 3625.53,1903.56 3625.53,1917.7 3602.83,1940.41 ; R2_CO3.2@4062.49,1932.22 4031.69,1963.03 3964.25,1963.03 3941.63,1940.41 3602.83,1940.41 ; R2_CO3.2@4067.34,1906.75 4153.11,1992.52 4209.37,1992.52 4210.63,1991.26 R9_CO3.1@4210.63,1982.4
NetIC1_CO3_4: IC1_CO3.4 R3_CO3.2 R4_CO3.2 R10_CO3.1 | length 1735.8
  Top Layer w6: 3522.97,1841.75 3585.97,1841.75 3607.97,1819.75 3640.35,1819.75 IC1_CO3.4@3643.54,1822.93
  Top Layer w10: v1(3180,1810) 3180,1800.6 3177.97,1798.57 3203.83,1772.71 3292.11,1772.71 3297.97,1778.57 ; 3298.04,1778.59 3327.34,1807.89 R3_CO3.2@3327.34,1816.75 ; R3_CO3.2@3327.94,1806.75 3331.13,1809.94 3509.26,1809.94 3518.7,1819.38 3518.7,1837.48 3522.97,1841.75 ; R4_CO3.2@4056.98,1825.61 R4_CO3.2@4069.37,1825.61 4069.37,1834.46 4083.07,1848.17 4104.16,1848.17 4133.63,1877.64 4141.27,1870 v1(4141.27,1860) 4207.12,1860 R10_CO3.1@4212.6,1865.48 ; R10_CO3.1@4207.34,1872.51 R10_CO3.1@4207.34,1881.37
  Bottom Layer w10: v1(3180,1810) 3331.22,1810 3347.22,1826 3507.22,1826 3527.97,1846.75 4117.97,1846.75 4135,1863.78 v1@4140,1863.78
NetIC1_CO3_7: IC1_CO3.7 R5_CO3.2 R6_CO3.2 R12_CO3.2 | length 1664
  Top Layer w6: 3530.76,1749.71 3533.76,1752.71 3540.56,1752.71 3540.6,1752.75 3580.76,1752.75 3587.35,1746.16 IC1_CO3.7@3643.54,1746.16
  Top Layer w10: 3187.97,1726.75 3207.38,1746.16 3297.97,1746.16 3313.64,1730.49 3313.64,1710.45 R5_CO3.2@3327.34,1696.75 ; R5_CO3.2@3333.73,1716.75 3333.73,1712.31 3341.04,1705 3435.92,1705 3446.15,1715.23 3496.28,1715.23 3530.76,1749.71 ; R6_CO3.2@4084.37,1710.96 4090.33,1705 v1@4128.51,1705 ; v1(4150,1705) 4158.5,1705 4193.05,1670.45 R12_CO3.2@4212.6,1690
  Bottom Layer w10: v1(3175,1705) 3509.72,1705 3547.97,1666.75 4122.57,1666.75 4150,1694.18 v1(4150,1705)
NetIC1_CO3_10: IC1_CO3.10 R7_CO3.2 R8_CO3.2 R11_CO3.2 | length 1397.6
  Top Layer w6: 3515.2,1654.23 3535.46,1654.23 3544.95,1663.71 3637.86,1663.71 IC1_CO3.10@3643.54,1669.39
  Top Layer w10: R7_CO3.2@3326.94,1615 R7_CO3.2@3327.94,1616 R7_CO3.2@3327.94,1615 ; 3515.2,1654.23 3449.15,1654.23 3446.81,1651.89 3446.81,1651.23 3446.15,1651.23 3446.15,1644.2 3445.5,1643.56 3445.5,1638.34 3422.16,1615 R7_CO3.2@3327.94,1615 ; R8_CO3.2@4067.34,1616 4095.31,1588.03 4179.57,1588.03 R11_CO3.2@4212.6,1555 ; R8_CO3.2@4074.8,1593.03 4068.73,1586.96 4068.73,1576.33 3976.4,1483.99 3413.83,1483.99 3327.94,1569.87 R7_CO3.2@3327.94,1615
NetIC1_CO3_13: IC1_CO3.13 IC3_CO3.14 R23_CO3.2 | length 1711.3
  Top Layer w10: IC1_CO3.13@3874.87,1618.2 3889.02,1618.2 3892.87,1614.35 3892.87,1600.2 3948.59,1544.49 4010.43,1544.49 4035.43,1569.49 4035.43,1632.49 4041.29,1638.34 4098.84,1638.34 4116.19,1621 4393.8,1621 R23_CO3.2@4450,1564.8 4454.03,1560.78 4487.69,1560.78 4560.43,1488.03 4988.06,1488.03 5041.43,1541.4 5041.43,1667.66 4970.43,1738.66 4970.43,1778.57 4944,1805 IC3_CO3.14@4902.16,1805
NetIC1_CO3_14: IC1_CO3.14 R8_CO3.1 | length 125.2
  Top Layer w10: IC1_CO3.14@3874.87,1643.8 3917.97,1643.8 3945.76,1616 R8_CO3.1@3988.6,1616
NetIC1_CO3_16: IC1_CO3.16 IC3_CO3.12 R24_CO3.2 | length 1511.5
  Top Layer w10: IC1_CO3.16@3874.87,1694.98 3910.36,1694.98 3941.63,1663.71 4104.8,1663.71 4128.51,1640 4447.84,1640 R24_CO3.2@4450,1637.84 4458.86,1637.84 4473.54,1623.16 4473.54,1614.3 4515.43,1572.41 4515.43,1558.99 4566.4,1508.03 4985.43,1508.03 5025.43,1548.03 5025.43,1660 4980.43,1705 IC3_CO3.12@4902.16,1705
NetIC1_CO3_17: IC1_CO3.17 R6_CO3.1 | length 116.6
  Top Layer w10: IC1_CO3.17@3874.87,1720.57 3944.28,1720.57 3951.13,1713.71 R6_CO3.1@3988.6,1713.71
NetIC1_CO3_19: IC1_CO3.19 IC3_CO3.6 R22_CO3.1 | length 983.6
  Top Layer w10: IC1_CO3.19@3874.87,1771.75 3877.84,1774.71 3952.6,1774.71 3964.93,1787.05 4092.63,1787.05 4115.58,1810 4393.22,1810 R22_CO3.1@4440,1856.78 ; R22_CO3.1@4450,1857.15 4530.43,1776.72 4530.43,1678.03 4558.46,1650 4682.59,1650 IC3_CO3.6@4687.59,1655
NetIC1_CO3_20: IC1_CO3.20 R4_CO3.1 | length 119.7
  Top Layer w10: IC1_CO3.20@3874.87,1797.34 3878.73,1801.2 3906.59,1801.2 3917.14,1811.75 R4_CO3.1@3988.6,1811.75
NetIC1_CO3_22: IC1_CO3.22 IC3_CO3.4 R21_CO3.1 | length 914.8
  Top Layer w10: IC1_CO3.22@3874.87,1848.52 3923.04,1848.52 3940,1865.48 4082.8,1865.48 4142.31,1925 4440,1925 4465.43,1925 4630.43,1760 4682.59,1760 IC3_CO3.4@4687.59,1755
NetIC1_CO3_23: IC1_CO3.23 R2_CO3.1 | length 127.2
  Top Layer w10: IC1_CO3.23@3874.87,1874.11 3917.97,1874.11 3950.61,1906.75 R2_CO3.1@3988.6,1906.75
NetIC1_CO4_1: IC1_CO4.1 R1_CO4.2 R2_CO4.2 R9_CO4.1 | length 1146.5
  Top Layer w10: R1_CO4.2@3327.94,2606.75 3331.13,2609.94 3331.13,2633.31 3341.07,2643.25 3341.07,2684.44 3365.62,2708.99 3537.19,2708.99 3559.43,2686.75 3559.43,2640.41 3602.83,2640.41 ; IC1_CO4.1@3643.54,2599.7 3629.39,2599.7 3625.53,2603.56 3625.53,2617.7 3602.83,2640.41 ; R2_CO4.2@4062.49,2632.22 4031.69,2663.03 3964.25,2663.03 3941.63,2640.41 3602.83,2640.41 ; R2_CO4.2@4067.34,2606.75 4153.11,2692.52 4209.37,2692.52 4210.63,2691.26 R9_CO4.1@4210.63,2682.4
NetIC1_CO4_4: IC1_CO4.4 R3_CO4.2 R4_CO4.2 R10_CO4.1 | length 1735.8
  Top Layer w6: 3522.97,2541.75 3585.97,2541.75 3607.97,2519.75 3640.35,2519.75 IC1_CO4.4@3643.54,2522.93
  Top Layer w10: v1(3180,2510) 3180,2500.6 3177.97,2498.57 3203.83,2472.71 3292.11,2472.71 3297.97,2478.57 ; 3298.04,2478.59 3327.34,2507.89 R3_CO4.2@3327.34,2516.75 ; R3_CO4.2@3327.94,2506.75 3331.13,2509.94 3509.26,2509.94 3518.7,2519.38 3518.7,2537.48 3522.97,2541.75 ; R4_CO4.2@4056.98,2525.61 R4_CO4.2@4069.37,2525.61 4069.37,2534.46 4083.07,2548.17 4104.16,2548.17 4133.63,2577.64 4141.27,2570 v1(4141.27,2560) 4207.12,2560 R10_CO4.1@4212.6,2565.48 ; R10_CO4.1@4207.34,2572.51 R10_CO4.1@4207.34,2581.37
  Bottom Layer w10: v1(3180,2510) 3331.22,2510 3347.22,2526 3507.22,2526 3527.97,2546.75 4117.97,2546.75 4135,2563.78 v1@4140,2563.78
NetIC1_CO4_7: IC1_CO4.7 R5_CO4.2 R6_CO4.2 R12_CO4.2 | length 1664
  Top Layer w6: 3530.76,2449.71 3533.76,2452.71 3540.56,2452.71 3540.6,2452.75 3580.76,2452.75 3587.35,2446.16 IC1_CO4.7@3643.54,2446.16
  Top Layer w10: 3187.97,2426.75 3207.38,2446.16 3297.97,2446.16 3313.64,2430.49 3313.64,2410.45 R5_CO4.2@3327.34,2396.75 ; R5_CO4.2@3333.73,2416.75 3333.73,2412.31 3341.04,2405 3435.92,2405 3446.15,2415.23 3496.28,2415.23 3530.76,2449.71 ; R6_CO4.2@4084.37,2410.96 4090.33,2405 v1@4128.51,2405 ; v1(4150,2405) 4158.5,2405 4193.05,2370.45 R12_CO4.2@4212.6,2390
  Bottom Layer w10: v1(3175,2405) 3509.72,2405 3547.97,2366.75 4122.57,2366.75 4150,2394.18 v1(4150,2405)
NetIC1_CO4_10: IC1_CO4.10 R7_CO4.2 R8_CO4.2 R11_CO4.2 | length 1397.6
  Top Layer w6: 3515.2,2354.23 3535.46,2354.23 3544.95,2363.71 3637.86,2363.71 IC1_CO4.10@3643.54,2369.39
  Top Layer w10: R7_CO4.2@3326.94,2315 R7_CO4.2@3327.94,2316 R7_CO4.2@3327.94,2315 ; 3515.2,2354.23 3449.15,2354.23 3446.81,2351.89 3446.81,2351.23 3446.15,2351.23 3446.15,2344.2 3445.5,2343.56 3445.5,2338.34 3422.16,2315 R7_CO4.2@3327.94,2315 ; R8_CO4.2@4067.34,2316 4095.31,2288.03 4179.57,2288.03 R11_CO4.2@4212.6,2255 ; R8_CO4.2@4074.8,2293.03 4068.73,2286.96 4068.73,2276.33 3976.4,2183.99 3413.83,2183.99 3327.94,2269.87 R7_CO4.2@3327.94,2315
NetIC1_CO4_13: IC1_CO4.13 IC3_CO4.14 R23_CO4.2 | length 1711.3
  Top Layer w10: IC1_CO4.13@3874.87,2318.2 3889.02,2318.2 3892.87,2314.35 3892.87,2300.2 3948.59,2244.49 4010.43,2244.49 4035.43,2269.49 4035.43,2332.49 4041.29,2338.34 4098.84,2338.34 4116.19,2321 4393.8,2321 R23_CO4.2@4450,2264.8 4454.03,2260.78 4487.69,2260.78 4560.43,2188.03 4988.06,2188.03 5041.43,2241.4 5041.43,2367.66 4970.43,2438.66 4970.43,2478.57 4944,2505 IC3_CO4.14@4902.16,2505
NetIC1_CO4_14: IC1_CO4.14 R8_CO4.1 | length 125.2
  Top Layer w10: IC1_CO4.14@3874.87,2343.8 3917.97,2343.8 3945.76,2316 R8_CO4.1@3988.6,2316
NetIC1_CO4_16: IC1_CO4.16 IC3_CO4.12 R24_CO4.2 | length 1511.5
  Top Layer w10: IC1_CO4.16@3874.87,2394.98 3910.36,2394.98 3941.63,2363.71 4104.8,2363.71 4128.51,2340 4447.84,2340 R24_CO4.2@4450,2337.84 4458.86,2337.84 4473.54,2323.16 4473.54,2314.3 4515.43,2272.41 4515.43,2258.99 4566.4,2208.03 4985.43,2208.03 5025.43,2248.03 5025.43,2360 4980.43,2405 IC3_CO4.12@4902.16,2405
NetIC1_CO4_17: IC1_CO4.17 R6_CO4.1 | length 116.6
  Top Layer w10: IC1_CO4.17@3874.87,2420.57 3944.28,2420.57 3951.13,2413.71 R6_CO4.1@3988.6,2413.71
NetIC1_CO4_19: IC1_CO4.19 IC3_CO4.6 R22_CO4.1 | length 983.6
  Top Layer w10: IC1_CO4.19@3874.87,2471.75 3877.84,2474.71 3952.6,2474.71 3964.93,2487.05 4092.63,2487.05 4115.58,2510 4393.22,2510 R22_CO4.1@4440,2556.78 ; R22_CO4.1@4450,2557.15 4530.43,2476.72 4530.43,2378.03 4558.46,2350 4682.59,2350 IC3_CO4.6@4687.59,2355
NetIC1_CO4_20: IC1_CO4.20 R4_CO4.1 | length 119.7
  Top Layer w10: IC1_CO4.20@3874.87,2497.34 3878.73,2501.2 3906.59,2501.2 3917.14,2511.75 R4_CO4.1@3988.6,2511.75
NetIC1_CO4_22: IC1_CO4.22 IC3_CO4.4 R21_CO4.1 | length 914.8
  Top Layer w10: IC1_CO4.22@3874.87,2548.52 3923.04,2548.52 3940,2565.48 4082.8,2565.48 4142.31,2625 4440,2625 4465.43,2625 4630.43,2460 4682.59,2460 IC3_CO4.4@4687.59,2455
NetIC1_CO4_23: IC1_CO4.23 R2_CO4.1 | length 127.2
  Top Layer w10: IC1_CO4.23@3874.87,2574.11 3917.97,2574.11 3950.61,2606.75 R2_CO4.1@3988.6,2606.75
NetIC1_CO5_1: IC1_CO5.1 R1_CO5.2 R2_CO5.2 R9_CO5.1 | length 1146.5
  Top Layer w10: R1_CO5.2@3327.94,3306.75 3331.13,3309.94 3331.13,3333.31 3341.07,3343.25 3341.07,3384.44 3365.62,3408.99 3537.19,3408.99 3559.43,3386.75 3559.43,3340.41 3602.83,3340.41 ; IC1_CO5.1@3643.54,3299.7 3629.39,3299.7 3625.53,3303.56 3625.53,3317.7 3602.83,3340.41 ; R2_CO5.2@4062.49,3332.22 4031.69,3363.03 3964.25,3363.03 3941.63,3340.41 3602.83,3340.41 ; R2_CO5.2@4067.34,3306.75 4153.11,3392.52 4209.37,3392.52 4210.63,3391.26 R9_CO5.1@4210.63,3382.4
NetIC1_CO5_4: IC1_CO5.4 R3_CO5.2 R4_CO5.2 R10_CO5.1 | length 1735.8
  Top Layer w6: 3522.97,3241.75 3585.97,3241.75 3607.97,3219.75 3640.35,3219.75 IC1_CO5.4@3643.54,3222.93
  Top Layer w10: v1(3180,3210) 3180,3200.6 3177.97,3198.57 3203.83,3172.71 3292.11,3172.71 3297.97,3178.57 ; 3298.04,3178.59 3327.34,3207.89 R3_CO5.2@3327.34,3216.75 ; R3_CO5.2@3327.94,3206.75 3331.13,3209.94 3509.26,3209.94 3518.7,3219.38 3518.7,3237.48 3522.97,3241.75 ; R4_CO5.2@4056.98,3225.61 R4_CO5.2@4069.37,3225.61 4069.37,3234.46 4083.07,3248.17 4104.16,3248.17 4133.63,3277.64 4141.27,3270 v1(4141.27,3260) 4207.12,3260 R10_CO5.1@4212.6,3265.48 ; R10_CO5.1@4207.34,3272.51 R10_CO5.1@4207.34,3281.37
  Bottom Layer w10: v1(3180,3210) 3331.22,3210 3347.22,3226 3507.22,3226 3527.97,3246.75 4117.97,3246.75 4135,3263.78 v1@4140,3263.78
NetIC1_CO5_7: IC1_CO5.7 R5_CO5.2 R6_CO5.2 R12_CO5.2 | length 1664
  Top Layer w6: 3530.76,3149.71 3533.76,3152.71 3540.56,3152.71 3540.6,3152.75 3580.76,3152.75 3587.35,3146.16 IC1_CO5.7@3643.54,3146.16
  Top Layer w10: 3187.97,3126.75 3207.38,3146.16 3297.97,3146.16 3313.64,3130.49 3313.64,3110.45 R5_CO5.2@3327.34,3096.75 ; R5_CO5.2@3333.73,3116.75 3333.73,3112.31 3341.04,3105 3435.92,3105 3446.15,3115.23 3496.28,3115.23 3530.76,3149.71 ; R6_CO5.2@4084.37,3110.96 4090.33,3105 v1@4128.51,3105 ; v1(4150,3105) 4158.5,3105 4193.05,3070.45 R12_CO5.2@4212.6,3090
  Bottom Layer w10: v1(3175,3105) 3509.72,3105 3547.97,3066.75 4122.57,3066.75 4150,3094.18 v1(4150,3105)
NetIC1_CO5_10: IC1_CO5.10 R7_CO5.2 R8_CO5.2 R11_CO5.2 | length 1397.6
  Top Layer w6: 3515.2,3054.23 3535.46,3054.23 3544.95,3063.71 3637.86,3063.71 IC1_CO5.10@3643.54,3069.39
  Top Layer w10: R7_CO5.2@3326.94,3015 R7_CO5.2@3327.94,3016 R7_CO5.2@3327.94,3015 ; 3515.2,3054.23 3449.15,3054.23 3446.81,3051.89 3446.81,3051.23 3446.15,3051.23 3446.15,3044.2 3445.5,3043.56 3445.5,3038.34 3422.16,3015 R7_CO5.2@3327.94,3015 ; R8_CO5.2@4067.34,3016 4095.31,2988.03 4179.57,2988.03 R11_CO5.2@4212.6,2955 ; R8_CO5.2@4074.8,2993.03 4068.73,2986.96 4068.73,2976.33 3976.4,2883.99 3413.83,2883.99 3327.94,2969.87 R7_CO5.2@3327.94,3015
NetIC1_CO5_13: IC1_CO5.13 IC3_CO5.14 R23_CO5.2 | length 1711.3
  Top Layer w10: IC1_CO5.13@3874.87,3018.2 3889.02,3018.2 3892.87,3014.35 3892.87,3000.2 3948.59,2944.49 4010.43,2944.49 4035.43,2969.49 4035.43,3032.49 4041.29,3038.34 4098.84,3038.34 4116.19,3021 4393.8,3021 R23_CO5.2@4450,2964.8 4454.03,2960.78 4487.69,2960.78 4560.43,2888.03 4988.06,2888.03 5041.43,2941.4 5041.43,3067.66 4970.43,3138.66 4970.43,3178.57 4944,3205 IC3_CO5.14@4902.16,3205
NetIC1_CO5_14: IC1_CO5.14 R8_CO5.1 | length 125.2
  Top Layer w10: IC1_CO5.14@3874.87,3043.8 3917.97,3043.8 3945.76,3016 R8_CO5.1@3988.6,3016
NetIC1_CO5_16: IC1_CO5.16 IC3_CO5.12 R24_CO5.2 | length 1511.5
  Top Layer w10: IC1_CO5.16@3874.87,3094.98 3910.36,3094.98 3941.63,3063.71 4104.8,3063.71 4128.51,3040 4447.84,3040 R24_CO5.2@4450,3037.84 4458.86,3037.84 4473.54,3023.16 4473.54,3014.3 4515.43,2972.41 4515.43,2958.99 4566.4,2908.03 4985.43,2908.03 5025.43,2948.03 5025.43,3060 4980.43,3105 IC3_CO5.12@4902.16,3105
NetIC1_CO5_17: IC1_CO5.17 R6_CO5.1 | length 116.6
  Top Layer w10: IC1_CO5.17@3874.87,3120.57 3944.28,3120.57 3951.13,3113.71 R6_CO5.1@3988.6,3113.71
NetIC1_CO5_19: IC1_CO5.19 IC3_CO5.6 R22_CO5.1 | length 983.6
  Top Layer w10: IC1_CO5.19@3874.87,3171.75 3877.84,3174.71 3952.6,3174.71 3964.93,3187.05 4092.63,3187.05 4115.58,3210 4393.22,3210 R22_CO5.1@4440,3256.78 ; R22_CO5.1@4450,3257.15 4530.43,3176.72 4530.43,3078.03 4558.46,3050 4682.59,3050 IC3_CO5.6@4687.59,3055
NetIC1_CO5_20: IC1_CO5.20 R4_CO5.1 | length 119.7
  Top Layer w10: IC1_CO5.20@3874.87,3197.34 3878.73,3201.2 3906.59,3201.2 3917.14,3211.75 R4_CO5.1@3988.6,3211.75
NetIC1_CO5_22: IC1_CO5.22 IC3_CO5.4 R21_CO5.1 | length 914.8
  Top Layer w10: IC1_CO5.22@3874.87,3248.52 3923.04,3248.52 3940,3265.48 4082.8,3265.48 4142.31,3325 4440,3325 4465.43,3325 4630.43,3160 4682.59,3160 IC3_CO5.4@4687.59,3155
NetIC1_CO5_23: IC1_CO5.23 R2_CO5.1 | length 127.2
  Top Layer w10: IC1_CO5.23@3874.87,3274.11 3917.97,3274.11 3950.61,3306.75 R2_CO5.1@3988.6,3306.75
NetIC1_CO6_1: IC1_CO6.1 R1_CO6.2 R2_CO6.2 R9_CO6.1 | length 1146.5
  Top Layer w10: R1_CO6.2@3327.94,4006.75 3331.13,4009.94 3331.13,4033.31 3341.07,4043.25 3341.07,4084.44 3365.62,4108.99 3537.19,4108.99 3559.43,4086.75 3559.43,4040.41 3602.83,4040.41 ; IC1_CO6.1@3643.54,3999.7 3629.39,3999.7 3625.53,4003.56 3625.53,4017.7 3602.83,4040.41 ; R2_CO6.2@4062.49,4032.22 4031.69,4063.03 3964.25,4063.03 3941.63,4040.41 3602.83,4040.41 ; R2_CO6.2@4067.34,4006.75 4153.11,4092.52 4209.37,4092.52 4210.63,4091.26 R9_CO6.1@4210.63,4082.4
NetIC1_CO6_4: IC1_CO6.4 R3_CO6.2 R4_CO6.2 R10_CO6.1 | length 1735.8
  Top Layer w6: 3522.97,3941.75 3585.97,3941.75 3607.97,3919.75 3640.35,3919.75 IC1_CO6.4@3643.54,3922.93
  Top Layer w10: v1(3180,3910) 3180,3900.6 3177.97,3898.57 3203.83,3872.71 3292.11,3872.71 3297.97,3878.57 ; 3298.04,3878.59 3327.34,3907.89 R3_CO6.2@3327.34,3916.75 ; R3_CO6.2@3327.94,3906.75 3331.13,3909.94 3509.26,3909.94 3518.7,3919.38 3518.7,3937.48 3522.97,3941.75 ; R4_CO6.2@4056.98,3925.61 R4_CO6.2@4069.37,3925.61 4069.37,3934.46 4083.07,3948.17 4104.16,3948.17 4133.63,3977.64 4141.27,3970 v1(4141.27,3960) 4207.12,3960 R10_CO6.1@4212.6,3965.48 ; R10_CO6.1@4207.34,3972.51 R10_CO6.1@4207.34,3981.37
  Bottom Layer w10: v1(3180,3910) 3331.22,3910 3347.22,3926 3507.22,3926 3527.97,3946.75 4117.97,3946.75 4135,3963.78 v1@4140,3963.78
NetIC1_CO6_7: IC1_CO6.7 R5_CO6.2 R6_CO6.2 R12_CO6.2 | length 1664
  Top Layer w6: 3530.76,3849.71 3533.76,3852.71 3540.56,3852.71 3540.6,3852.75 3580.76,3852.75 3587.35,3846.16 IC1_CO6.7@3643.54,3846.16
  Top Layer w10: 3187.97,3826.75 3207.38,3846.16 3297.97,3846.16 3313.64,3830.49 3313.64,3810.45 R5_CO6.2@3327.34,3796.75 ; R5_CO6.2@3333.73,3816.75 3333.73,3812.31 3341.04,3805 3435.92,3805 3446.15,3815.23 3496.28,3815.23 3530.76,3849.71 ; R6_CO6.2@4084.37,3810.96 4090.33,3805 v1@4128.51,3805 ; v1(4150,3805) 4158.5,3805 4193.05,3770.45 R12_CO6.2@4212.6,3790
  Bottom Layer w10: v1(3175,3805) 3509.72,3805 3547.97,3766.75 4122.57,3766.75 4150,3794.18 v1(4150,3805)